# Altium PCB PCB1.PcbDoc
Units mil, origin at the board's own origin, x right, y up, seen from the top; angles counter-clockwise.
Board outline 4000 x 5000 mil, 2 copper layers (Top Layer, Bottom Layer); 50 components, 14 nets, 124 pads, 142 vias.
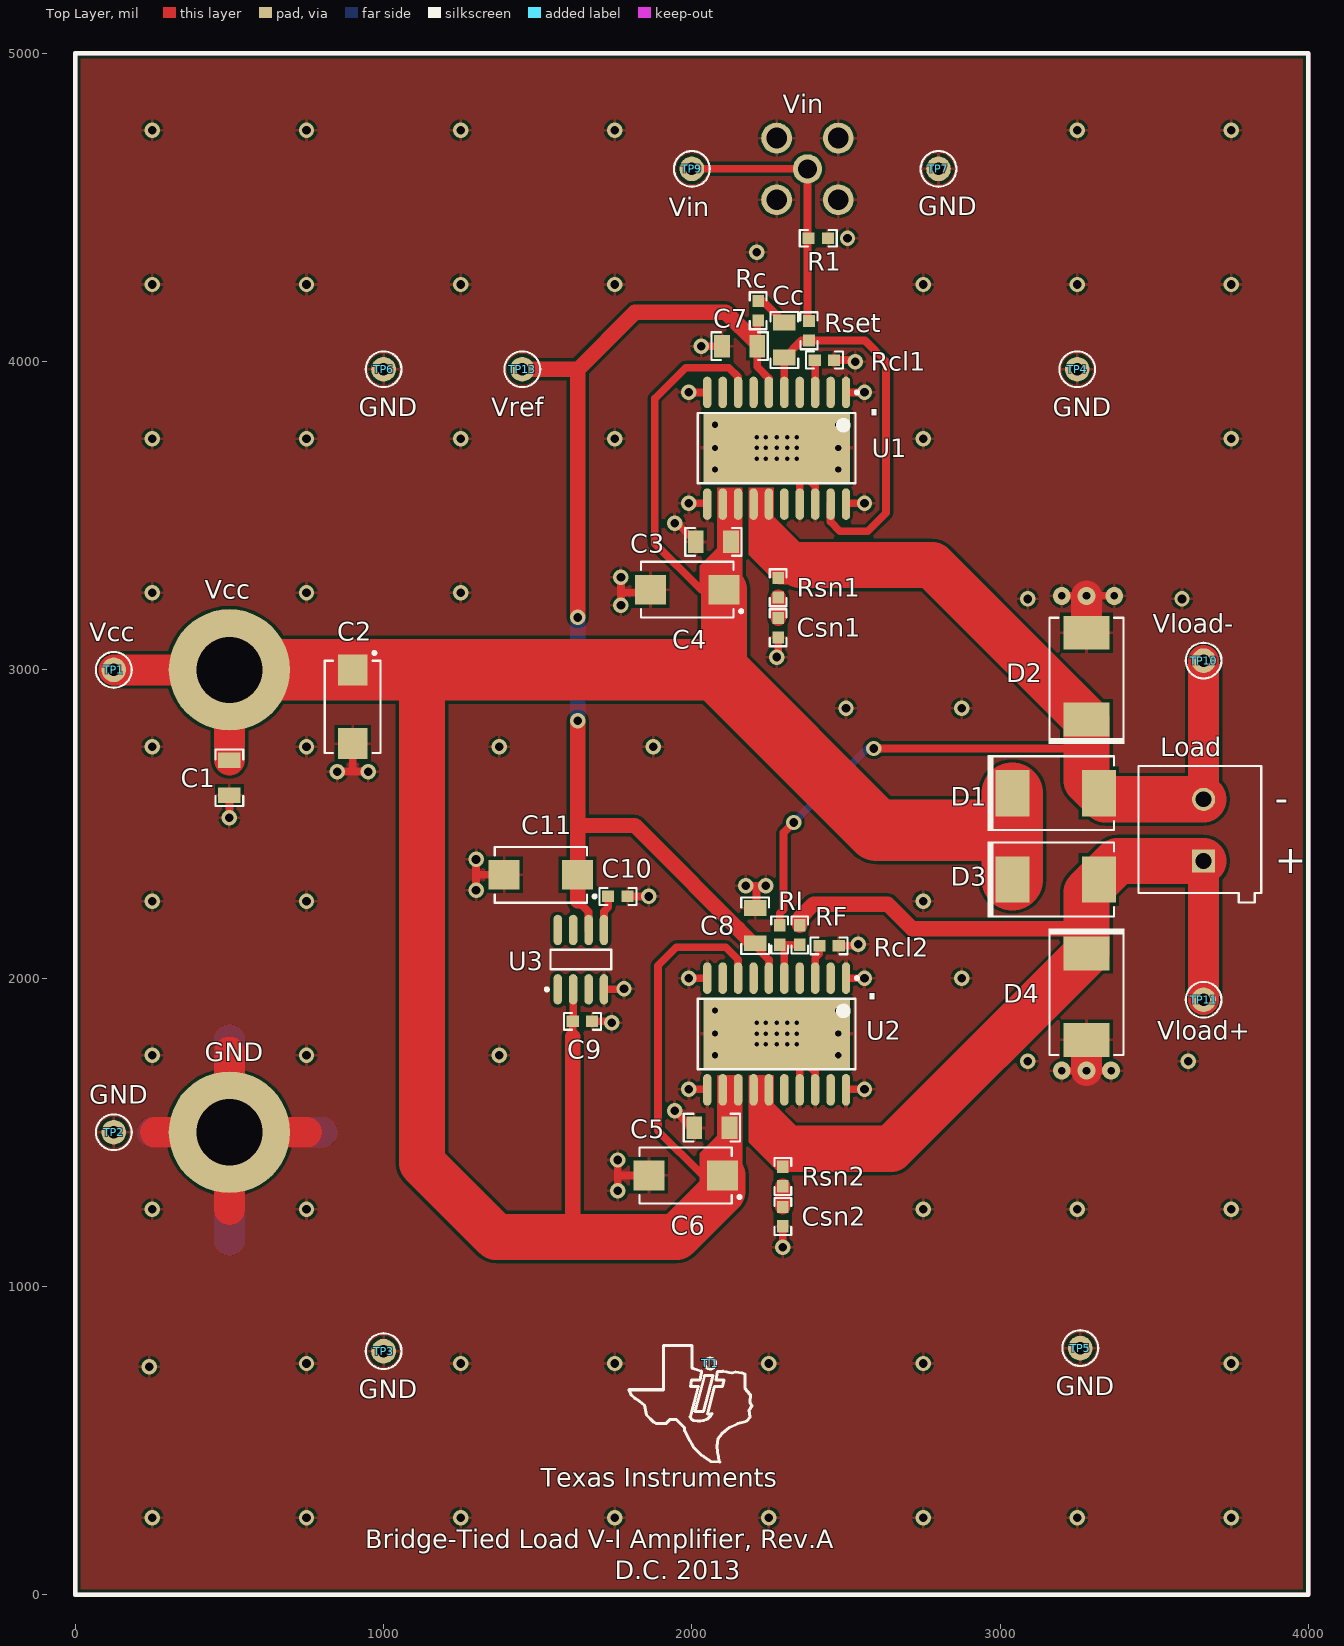
[diagram p0: Top Layer view]
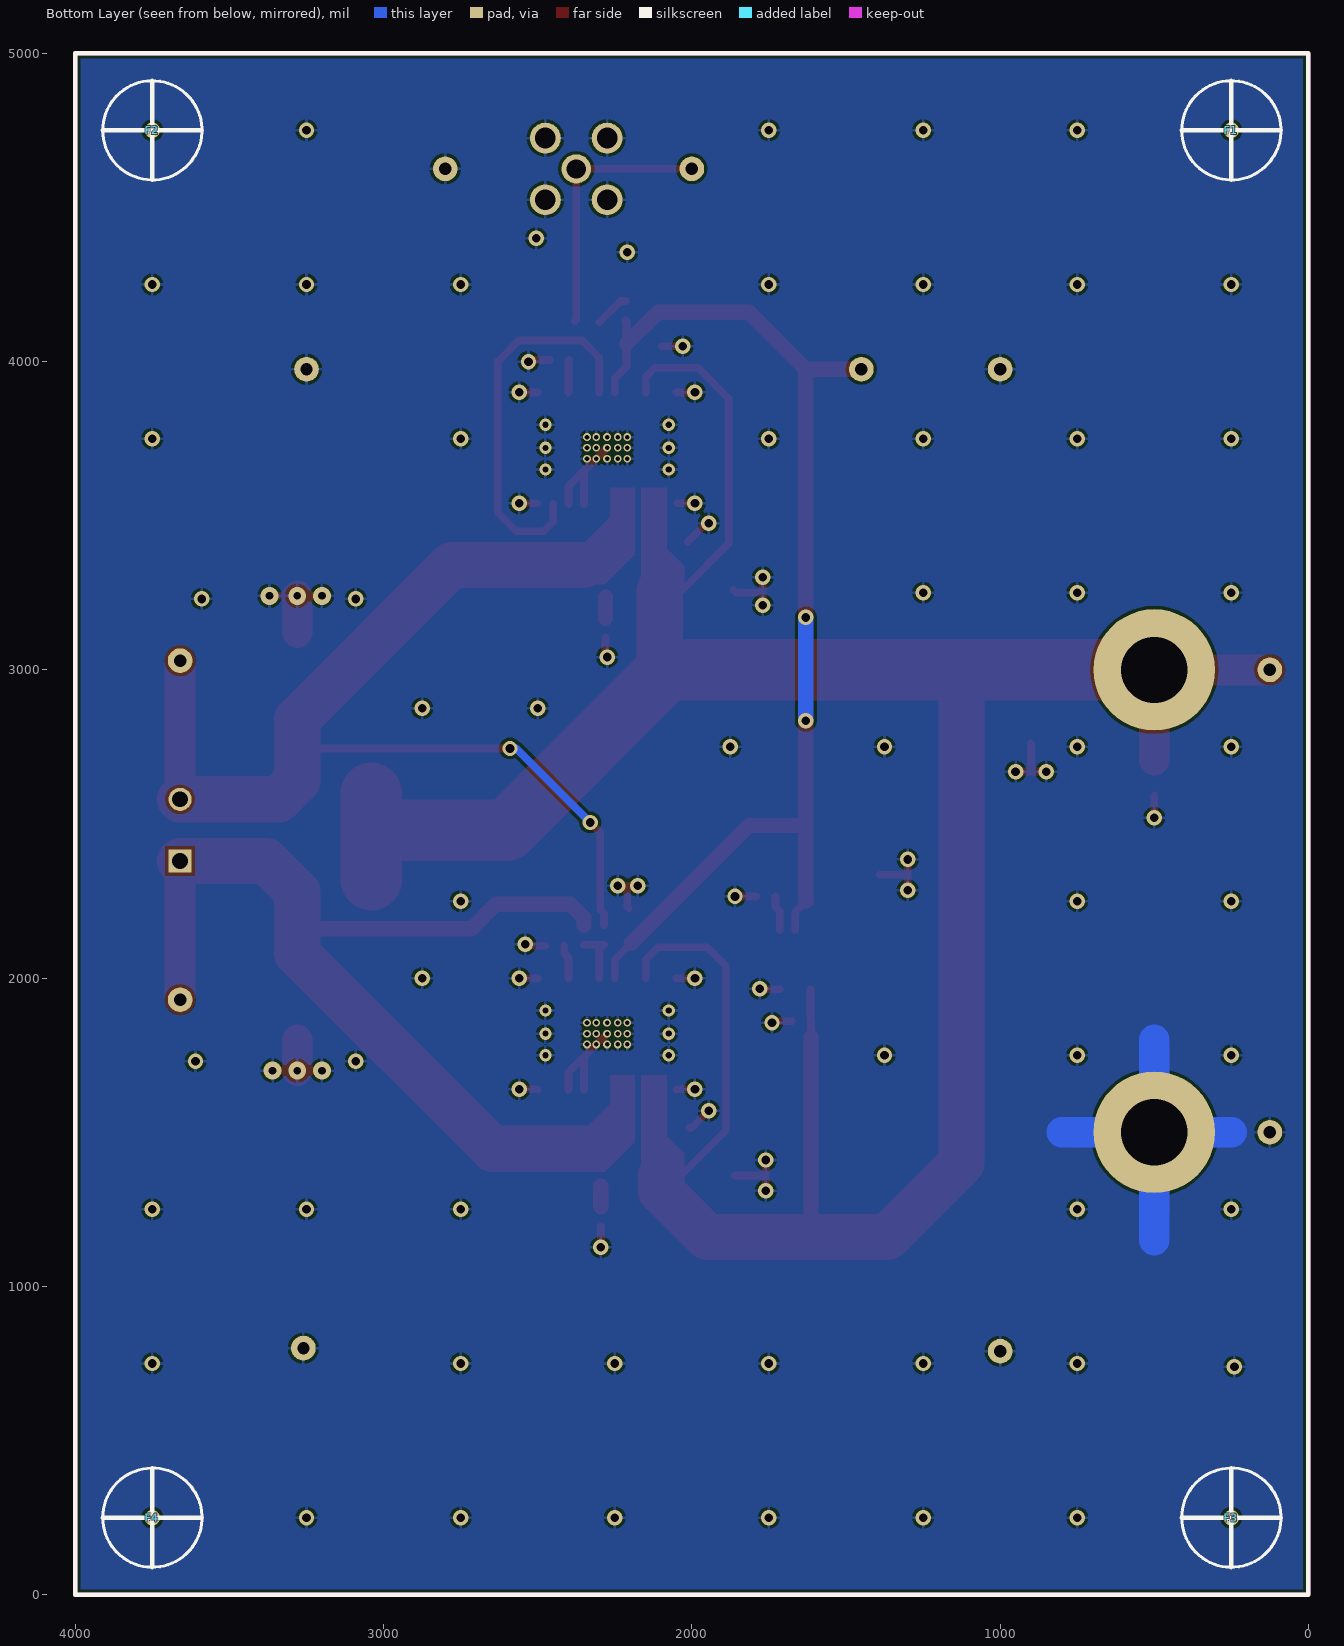
[diagram p1: Bottom Layer view, seen from below]

## Layer stack, top to bottom
Top Layer: signal copper 1.4
Dielectric: dielectric 12.6, FR-4, Dk 4.8
Bottom Layer: signal copper 1.4

## Board outline
0,0 4000,0 4000,5000 0,5000

## Design rules (kind name [scope] priority, off if disabled: settings)
Clearance [All] p1: gap=10
HoleSize [All] p1: absolutevalues=TRUE maxlimit=246 minlimit=15 maxpercent=80.000 minpercent=20.000
MinimumSolderMaskSliver [All] p1: minsoldermaskwidth=0
PolygonConnect [All] p1: connectstyle=Relief reliefconductorwidth=10 reliefentries=4 polygonreliefangle="90 Angle" airgapwidth=10
RoutingVias [All] p1: holewidth=28 width=50 viastyle="Through Hole" minholewidth=28 minwidth=50 maxholewidth=28 maxwidth=50
SilkToSilkClearance [All] p1: silktosilkclearance=0
SilkscreenOverComponentPads [InNet('No Net') vs InNet('No Net')] p1: minsilkscreentomaskgap=0
SolderMaskExpansion [All] p1: expansion=4
Width [All] p1: maxlimit=200 minlimit=10 preferedwidth=25
24 further rules are at their usual default settings.

## Components (designator, comment, footprint, x,y, rotation, side; value= is the part's Value field where it differs from the comment)
C1 "12065C104JAT2A" 1206 500,2650 r270 top
C2 "293D476X0016D2TE3" 7343-31 900,2880 r270 top
C3 "12065C104JAT2A" 1206 2070,3415 r180 top
C4 "293D476X0016D2TE3" 7343-31 1985,3260 r180 top
C5 "12065C104JAT2A" 1206 2065,1515 r180 top
C6 "293D476X0016D2TE3" 7343-31 1980,1360 r180 top
C7 "12065C104JAT2A" 1206 2155,4050 r180 top
C8 "12065C104JAT2A" 1206 2205,2170 r90 top
C9 "GRM188R71E105KA12D" 0603 1645,1860 r0 top
C10 "GRM188R71E105KA12D" 0603 1760,2265 r0 top
C11 "293D476X0016D2TE3" 7343-31 1510,2335 r180 top
Cc "C3216X7R2A474K" 1206 2300,4070 r90 top
Csn1 "C0603C103J5RACTU" 0603 2280,3136.5 r270 top
Csn2 "C0603C103J5RACTU" 0603 2295,1226.5 r270 top
D1 "30BQ015TRPBF" SMC 3180,2600 r0 top
D2 "30BQ015TRPBF" SMC 3280,2980 r90 top
D3 "30BQ015TRPBF" SMC 3180,2320 r0 top
D4 "30BQ015TRPBF" SMC 3280,1940 r270 top
F1 "PartNumber" Rubber_Foot 250,4750 r180 bottom
F2 "PartNumber" Rubber_Foot 3750,4750 r180 bottom
F3 "PartNumber" Rubber_Foot 250,250 r180 bottom
F4 "PartNumber" Rubber_Foot 3750,250 r180 bottom
GND "" Keystone_575-4 500,1500 r90 top
Load "" PhoenixContact_1715721 3660,2480 r90 top
R1 "RC0603FR-0710KL" 0603 2410,4400 r180 top
Rc "RC0603FR-07249RL" 0603 2215,4165 r90 top
Rcl1 "RC0603FR-075K49L" 0603 2430,4005 r180 top
Rcl2 "RC0603FR-075K49L" 0603 2445,2105 r180 top
RF "RC0603FR-071KL" 0603 2350,2140 r90 top
RI "RC0603FR-071KL" 0603 2285,2140 r90 top
Rset "RC0603FR-07475RL" 0603 2380,4100 r270 top
Rsn1 "CRCW060310R0FKEA" 0603 2280,3266.5 r90 top
Rsn2 "CRCW060310R0FKEA" 0603 2295,1356.5 r90 top
TI1 "Texas Instruments logo" "TI LOGO" 2060,750 r0 top
TP1 "Vcc" Keystone5000 125,3000 r90 top
TP2 "GND" Keystone5001 125,1500 r90 top
TP3 "GND" Keystone5001 1000,790 r90 top
TP4 "GND" Keystone5001 3250,3975 r90 top
TP5 "GND" Keystone5001 3260,800 r90 top
TP6 "GND" Keystone5001 1000,3975 r90 top
TP7 "GND" Keystone5001 2800,4625 r90 top
TP9 "Vin" Keystone5000 2000,4625 r270 top
TP10 "Vload-" Keystone5002 3660,3030 r90 top
TP11 "Vload+" Keystone5002 3660,1930 r90 top
TP13 "Vref" Keystone5000 1450,3975 r90 top
U1 "OPA569AIDWPR" "SOIC-20-PWP (DWP)" 2500,3900 r270 top
U2 "OPA569AIDWPR" "SOIC-20-PWP (DWP)" 2500,2000 r270 top
U3 "REF5025" M08A_M 1640,2060 r90 top
Vcc "" Keystone_575-4 500,3000 r90 top
Vin "" Johnson_142-0701-20x 2375,4625 r90 top

## Footprints (in the part's own frame and the unit in brackets; to place one, negate y for a bottom-side part, rotate by r counter-clockwise, add the part's x,y. Pads: shape width x height; smd on the part's side, far side on the other; paste and mask are expansions set on the pad)
0603 [mm] "0603 from SM-752 data"
  rect 1x0.95 smd: 1(-0.8,0) 2(0.8,0)
  silkscreen extent -1.52,-0.69 1.52,0.69, body extent -0.87,-0.47 0.87,0.47, height 0.85
1206 [mm] "1206 from SM-752 data"
  rect 1.3x1.85 smd: 1(-1.45,0) 2(1.45,0)
  silkscreen extent -2.32,-1.14 2.32,1.14, body extent -1.7,-0.9 1.7,0.9, height 1.35
7343-31 [mm] "Medium Density based on Kemet T495 dimensions"
  rect 2.55x2.45 smd: 1(-3.025,0) 2(3.025,0)
  silkscreen extent -4.56,-2.3 3.8,2.3, body extent -3.8,-2.3 3.8,2.3, height 3.1
Johnson_142-0701-20x [mil] "Johnson Components recommended land pattern"
  round 95 hole 62: 1(0,0)
  round 100 hole 67: 2(100,100) 3(100,-100) 4(-100,-100) 5(-100,100)
  body extent -156,-156 156,156, height 375
Keystone5000 [mil] "For Keystone 500x miniature loop terminals"
  round 80 hole 40: 1(0,0)
  silkscreen extent -58,-58 58,58, body extent -49,-49 49,49, height 182
Keystone5001 [mil] "For Keystone 500x miniature loop terminals"
  round 80 hole 40: 1(0,0)
  silkscreen extent -58,-58 58,58, body extent -49,-49 49,49, height 182
Keystone5002 [mil] "For Keystone 500x miniature loop terminals"
  round 80 hole 40: 1(0,0)
  silkscreen extent -58,-58 58,58, body extent -49,-49 49,49, height 182
Keystone_575-4 [mm] "Banana Jack"
  round 10 hole 5.45: 1(0,0)
  body extent -3.95,-3.95 3.92,3.93, height 2.36
M08A_M [mm] "SOIC, 8-Leads, Body 4.9x3.9mm, Pitch 1.27mm, IPC Low Density"
  oval 2.5x0.7 smd: 1(-2.45,1.905) 2(-2.45,0.635) 3(-2.45,-0.635) 4(-2.45,-1.905) 5(2.45,-1.905) 6(2.45,-0.635) 7(2.45,0.635) 8(2.45,1.905)
  silkscreen extent -2.57,-2.5 0.8,2.93, body extent -2,-2.5 2,2.5, height 1.75
PhoenixContact_1715721 [mm] "Phoenix Contact 1715721 used on LM3445 design from Longmont"
  rect 1.905x1.905 hole 1.3: 1(-2.54,0)
  round 1.9 hole 1.3: 2(2.54,0)
  silkscreen extent -5.97,-4.75 5.28,5.36, body extent -5.82,-4.6 5.08,5.2, height 14.2
Rubber_Foot [mil] "Rubber Foot"
  silkscreen extent -161,-161 161,161
SMC [mil] "Molded Diode, 2-Leads, Body 6.9x5.8mm, IPC Medium Density, based on OnSemi component dimensions and land patterns"
  rect 110x150 smd: 1(-140.49,0) 2(140.49,0)
  silkscreen extent -221,-124 189,124, body extent -156,-116 156,116, height 91
"SOIC-20-PWP (DWP)" [mm]
  oval 2.6x0.7 smd: 1(0,0) 2(0,-1.27) 3(0,-2.54) 4(0,-3.81) 5(0,-5.08) 6(0,-6.35) 7(0,-7.62) 8(0,-8.89) 9(0,-10.16) 10(0,-11.43) 11(9.2,-11.43) 12(9.2,-10.16) 13(9.2,-8.89) 14(9.2,-7.62) 15(9.2,-6.35) 16(9.2,-5.08) 17(9.2,-3.81) 18(9.2,-2.54) 19(9.2,-1.27) 20(9.2,0)
  rect 5.715x12.09 smd: 21(4.572,-5.715)
  silkscreen extent -0.12,-12.21 7.5,1.03, body extent 0.85,-12.21 8.35,0.78, height 2.6
"TI LOGO" [mil] "TI BUG"
  silkscreen extent -264,-320 135,59

## Part data
C1 C3 C5 C7 C8: "CAP, CERM, 0.1uF, 50V, +/-5%, X7R, 1206"
C2 C4 C6 C11: "CAP, TANT, 47uF, 16V, +/-20%, 0.7 ohm, 7343-31 SMD"
C9 C10: "CAP, CERM, 1uF, 25V, +/-10%, X7R, 0603"
Cc: "CAP, CERM, 0.47uF, 100V, +/-10%, X7R, 1206"
Csn1 Csn2: "CAP, CERM, 0.01uF, 50V, +/-5%, X7R, 0603"
D1 D2 D3 D4: "Diode, Schottky, 15V, 3A, SMC"
F1 F2 F3 F4: library part SJ61A1, "BUMPON CYLINDRICAL .312X.200 BLK"
GND Vcc: library part 575-4, "Standard Banana Jack, Uninsulated, 5.5mm"
Load: library part 1715721, "Conn Term Block, 2POS, 5.08mm PCB"
R1: "RES, 10.0k ohm, 1%, 0.1W, 0603"
Rc: "RES, 249 ohm, 1%, 0.1W, 0603"
Rcl1 Rcl2: "RES, 5.49k ohm, 1%, 0.1W, 0603"
RF RI: "RES, 1.00k ohm, 1%, 0.1W, 0603"
Rset: "RES, 475 ohm, 1%, 0.1W, 0603"
Rsn1 Rsn2: "RES, 10.0 ohm, 1%, 0.1W, 0603"
TI1: library part "TI LOGO", "TI BUG"
TP1 TP9 TP13: library part 5000, "Test Point, TH, Miniature, Red"
TP2 TP3 TP4 TP5 TP6 TP7: library part 5001, "Test Point, TH, Miniature, Black"
TP10 TP11: library part 5002, "Test Point, TH, Miniature, White"
U1 U2: library part OPA569, "IC OPAMP GP R-R 1.2MHZ 20SOIC"
U3: "IC VREF SERIES PREC 2.5V 8-SOIC"
Vin: library part 142-0701-201, "Connector, TH, SMA"

## Via types
v1: diameter 50, hole 28, Top Layer to Bottom Layer, 94 vias
v2: diameter 25, hole 15, Top Layer to Bottom Layer, 30 vias
v3: diameter 40, hole 20, Top Layer to Bottom Layer, 12 vias
v4: diameter 58, hole 25, Top Layer to Bottom Layer, 6 vias

## Nets (pads, with @x,y where several pads share a name; then routed paths per layer and width w, separated by ;. In a path a pad name is that pad's centre, name@x,y a point inside that pad or via, vN(x,y) a via of type N, cw(c..) or ccw(c..) an arc to the next point about the centre after c; other vN are vias at no path point)
GND: C1.2 C2.2 C3.2 C4.2 C5.2 C6.2 C7.2 C8.2 C9.2 C10.2 C11.2 Csn1.2 Csn2.2 D2.2 D4.2 GND.1 R1.1 Rcl1.1 Rcl2.1 TP2.1 TP3.1 TP4.1 TP5.1 TP6.1 TP7.1 U1.1 U1.10 U1.11 U1.17 U1.18 U1.20 U1.21 U2.1 U2.10 U2.11 U2.17 U2.18 U2.20 U2.21 U3.4 Vin.2 Vin.3 Vin.4 Vin.5 | length 5578.7
  Top Layer w25: v1(500,2520) C1.2 ; v1(850,2670) 900,2670 ; C2.2 900,2670 ; v1(950,2670) 900,2670 ; v1(1300,2285) 1300,2335 ; v1(1300,2385) 1300,2335 ; C11.2 1300,2335 ; C9.2 1735,1860 v1(1740,1855) ; U3.4 v1@1778.54,1963.54 ; v1(1760,1310) 1760,1360 ; v1(1760,1410) 1760,1360 ; v1(1770,3210) 1770,3250 ; v1(1770,3300) 1770,3250 ; C10.2 v1(1860,2265) ; C6.2 1760,1360 ; C4.2 1855.91,3250 1770,3250 ; v1(1945,1570) 2000,1515 C5.2 ; v1(1945,3475) 1952.91,3475 C3.2 ; v1(1990,1640) 2047.8,1640 U2.11 ; v1(1990,2000) U2.10 ; v1(1990,3540) U1.11@2047.8,3540 ; v1(1990,3900) U1.10 ; v1(2030,4050) C7.2 ; v1(2175,2300) 2210,2300 2210,2232.09 C8.2 ; v2(2275,1820) v2(2310,1785) U2.21@2350,1745 ; v1(2275,3041.5) 2280,3046.5 Csn1.2 ; v2(2275,3720) v2(2310,3685) U1.21@2350,3645 ; v1(2295,1126.5) Csn2.2 ; U2.17 U2.21@2350,1745 ; U1.17 U1.21@2350,3645 ; U2.18 2400,1695 U2.21@2350,1745 ; U1.18 2400,3595 U1.21@2350,3645 ; Rcl1.1 2525,4005 v1(2530,4000) ; Rcl2.1 2535,2105 v1(2540,2110) ; U2.20 2502.2,1640 v1(2560,1640) ; U2.1 v1(2560,2000) ; U1.1 v1(2560,3900) ; U1.20@2502.2,3540 v1(2560,3540) ; v4(3200,1700) v4(3280,1700) v4(3360,1700) ; v4(3200,3240) v4(3280,3240) v4(3370,3240)
  Top Layer w100: 260,1500 GND.1 ; 500,1250 GND.1 ; 500,1760 GND.1 ; 750,1500 GND.1 ; v4(3280,1700) D4.2 ; D2.2 v4(3280,3240)
  Bottom Layer w100: 250,1500 GND.1 ; 500,1150 GND.1 ; 500,1800 GND.1 ; 800,1500 GND.1
  other v1: 250,250 750,250 1250,250 1750,250 2250,250 2750,250 3250,250 3750,250 240,740 750,750 1250,750 1750,750 2250,750 2750,750 3750,750 250,1250 750,1250 2750,1250 3250,1250 3750,1250 3090,1730 3610,1730 250,1750 750,1750 1375,1750 1780,1965 2875,2000 250,2250 750,2250 2750,2250 2240,2300 250,2750 750,2750 1375,2750 1875,2750 2500,2875 2875,2875 3090,3230 3590,3230 250,3250 750,3250 1250,3250 250,3750 750,3750 1250,3750 1750,3750 2750,3750 3750,3750 250,4250 750,4250 1250,4250 1750,4250 2750,4250 3250,4250 3750,4250 2210,4355 2505,4400 250,4750 750,4750 1250,4750 1750,4750 3250,4750 3750,4750
  other v2: 2210,1785 2240,1785 2275,1785 2340,1785 2210,1820 2240,1820 2310,1820 2340,1820 2210,1855 2240,1855 2275,1855 2310,1855 2340,1855 2210,3685 2240,3685 2275,3685 2340,3685 2210,3720 2240,3720 2310,3720 2340,3720 2210,3755 2240,3755 2275,3755 2310,3755 2340,3755
  other v3: 2075,1750 2475,1750 2075,1820 2475,1820 2075,1895 2475,1895 2075,3650 2475,3650 2075,3720 2475,3720 2075,3795 2475,3795
IMON: Cc.1 Rset.2 U1.5 U1.19 | length 1259.4
  Top Layer w25: U1.5 Cc.1 2355.59,4068.5 Rset.2 2561.5,4068.5 2630,4000 2630,3510 2570,3450 2480,3450 2450,3480 U1.19
NetC10_1: C10.1 U3.5 | length 114.1
  Top Layer w25: U3.5 1715,2216.5 1728.5,2230 C10.1
NetCc_2: Cc.2 Rc.2 | length 113.8
  Top Layer w25: Rc.2 2230.59,4196.5 Cc.2
NetCsn1_1: Csn1.1 Rsn1.1 | length 67
  Top Layer w50: Csn1.1 Rsn1.1
NetCsn2_1: Csn2.1 Rsn2.1 | length 67
  Top Layer w50: Csn2.1 Rsn2.1
NetD1_2: D1.2 D2.1 Load.2 RI.2 Rsn1.2 TP10.1 U1.14 U1.15 | length 3683.3
  Top Layer w25: RI.2 2285,2210 2297.5,2222.5 2297.5,2472.5 v1(2330,2505) v1@2335,2510 ; v1(2590,2745) 3280,2745
  Top Layer w50: 2300,3390.49 2300,3402.83
  Top Layer w100: 2300,3390.49 2350.49,3340 ; Load.2 TP10.1
  Top Layer w150: 2350.49,3340 2779.51,3340 D2.1 3280,2745 3280,2640.49 D1.2 3340.49,2580 Load.2
  Bottom Layer w25: v1(2330,2505) 2570,2745 v1(2590,2745)
NetD3_2: D3.2 D4.1 Load.1 RF.2 Rsn2.2 TP11.1 U2.14 U2.15 | length 3305.1
  Top Layer w50: RF.2 2350,2195 2395,2240 2635,2240 2715,2160 3280,2160
  Top Layer w100: TP11.1 Load.1
  Top Layer w150: 2313.45,1446.55 2646.06,1446.55 D4.1 3280,2160 3280,2279.51 D3.2 3380.49,2380 Load.1
NetR1_2: R1.2 Rset.1 TP9.1 Vin.1 | length 870.6
  Top Layer w25: TP9.1 Vin.1 2375,4136.5 Rset.1
NetRcl1_2: Rcl1.2 U1.3 | length 105.6
  Top Layer w25: Rcl1.2 2400,4003.5 U1.3
NetRcl2_2: Rcl2.2 U2.3 | length 110.6
  Top Layer w25: U2.3 2400,2066.5 2413.5,2080 Rcl2.2
NetRF_1: RF.1 RI.1 U2.5 | length 179.7
  Top Layer w25: U2.5 2300,2093.5 RI.1 RF.1
VCC: C1.1 C2.1 C3.1 C4.1 C5.1 C6.1 C9.1 D1.1 D3.1 TP1.1 U1.8 U1.12 U1.13 U2.8 U2.12 U2.13 U3.2 Vcc.1 | length 9862.3
  Top Layer w25: 1613.5,1810.75 C9.1 1615,1861.5 U3.2 ; C6.1 2035,1360 1890,1505 1890,2040 1950,2100 2110,2100 2150,2060 U2.8 ; C4.1 2030,3260 1880,3410 1880,3880 1980,3980 2120,3980 2150,3950 U1.8
  Top Layer w50: 1605,1160 1613.5,1168.5 1613.5,1810.75
  Top Layer w100: TP1.1 Vcc.1 C1.1
  Top Layer w150: 1125,3000 1125,1400 1365,1160 1605,1160 1950,1160 2099.09,1309.09 C6.1 ; 2080,3000 2104.09,3024.09 C4.1
  Top Layer w200: Vcc.1 1125,3000 2080,3000 2600,2480 3039.51,2480 ; D3.1 3039.51,2480 ; D1.1 3039.51,2480
VREF: C7.1 C8.1 C11.1 Rc.1 TP13.1 U1.6 U2.6 U3.6 | length 3884.1
  Top Layer w25: 1629.09,2250.35 1665,2214.45 U3.6 ; C8.1@2197.09,2112.87 2250,2059.96 U2.6 ; C7.1 2212.09,3982.91 2250,3945 U1.6 ; C7.1@2212.09,4057.91 2212.09,4130.59 Rc.1
  Top Layer w50: TP13.1 1630,3975 ; 1629.09,2250.35 1630,2251.26 1630,2495 ; v1(1630,2835) 1630,2495 ; v1(1630,3170) 1630,3975 ; 2149.96,2160 C8.1@2197.09,2112.87 ; C8.1@2197.09,2112.91 1815,2495 1630,2495 ; C7.1@2212.09,4057.91 2110,4160 1815,4160 1630,3975
  Bottom Layer w50: v1(1630,2835) v1(1630,3170)
pads on no net: U1.2 U1.4 U1.7 U1.9 U1.16 U2.2 U2.4 U2.7 U2.9 U2.16 U2.19 U3.1 U3.3 U3.7 U3.8

## Polygon pours and split planes (outlines as drawn)
GND on Bottom Layer "Bottom Layer-GND" (solid, remove dead copper, pour order 4): 0,5000 4000,5000 4000,0 0,0
GND on Top Layer "Top Layer-GND" (solid, remove dead copper, pour order 2): 0,5000 4000,5000 4000,0 0,0

## Keep-outs
Keep-Out Layer:
  the board outline again, w15

## Other copper
Top Layer:
  region net NetD1_2: 2185,3590 2185,3373 2281,3277 2377,3277 2377,3385 2265,3497 2265,3590
  region net VCC: 2164,3590 2164,3256 2025,3256 2025,3337 2082,3394 2082,3590
  region net VCC: 2164,1685 2164,1351 2025,1351 2025,1432 2082,1489 2082,1685
  region net NetD3_2: 2185,1685 2185,1468 2281,1372 2377,1372 2377,1480 2265,1592 2265,1685

## Silkscreen, mask and mechanical layers (free items; w line width, h text height)
Top Overlay:
  the board outline again, w15
  text "." at 2565,3825 h120
  text "-" at 3890,2540 h90
  text "+" at 3890,2340 h90
  text "." at 2560,1930 h120
  text "Texas Instruments" at 1510,350 h60
  text "Bridge-Tied Load V-I Amplifier, Rev.A" at 940,150 h60
  text "D.C. 2013" at 1750,50 h60
Bottom Overlay:
  the board outline again, w15
Top Solder:
  the board outline again, w15
Bottom Solder:
  the board outline again, w15